# EAGLE board brick_i2c_humidity_Si7034 (EAGLE 7.4.0)
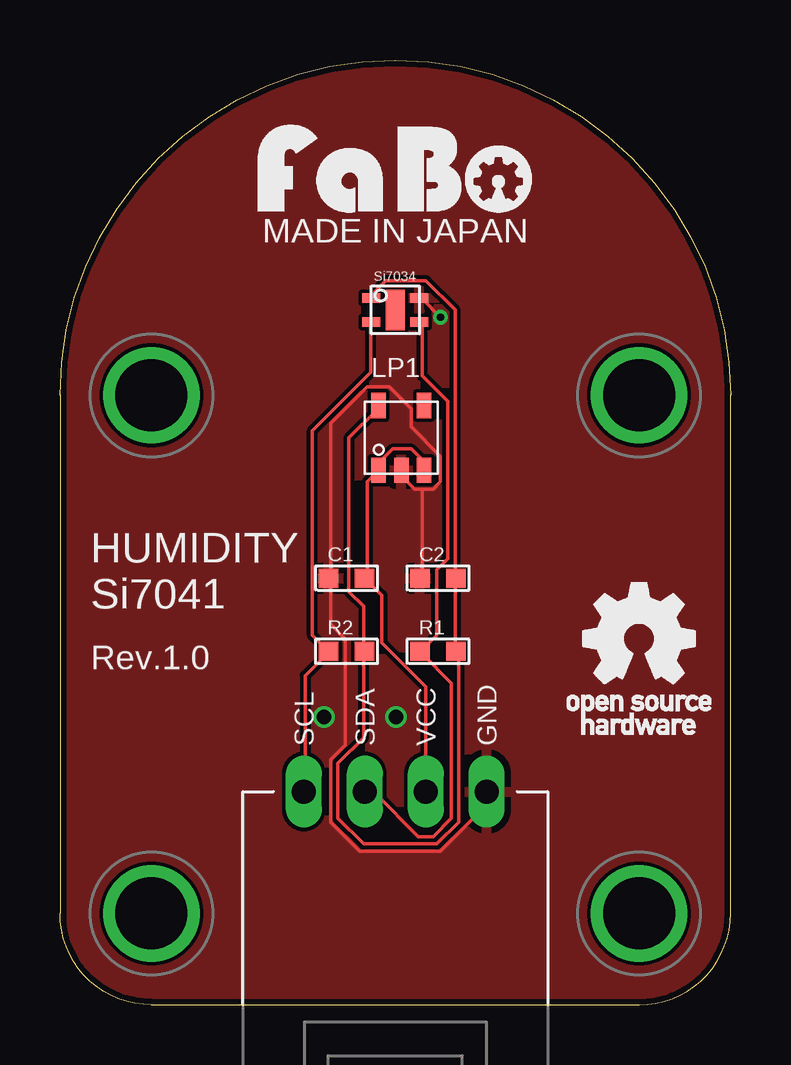
[diagram p0: board, top side]
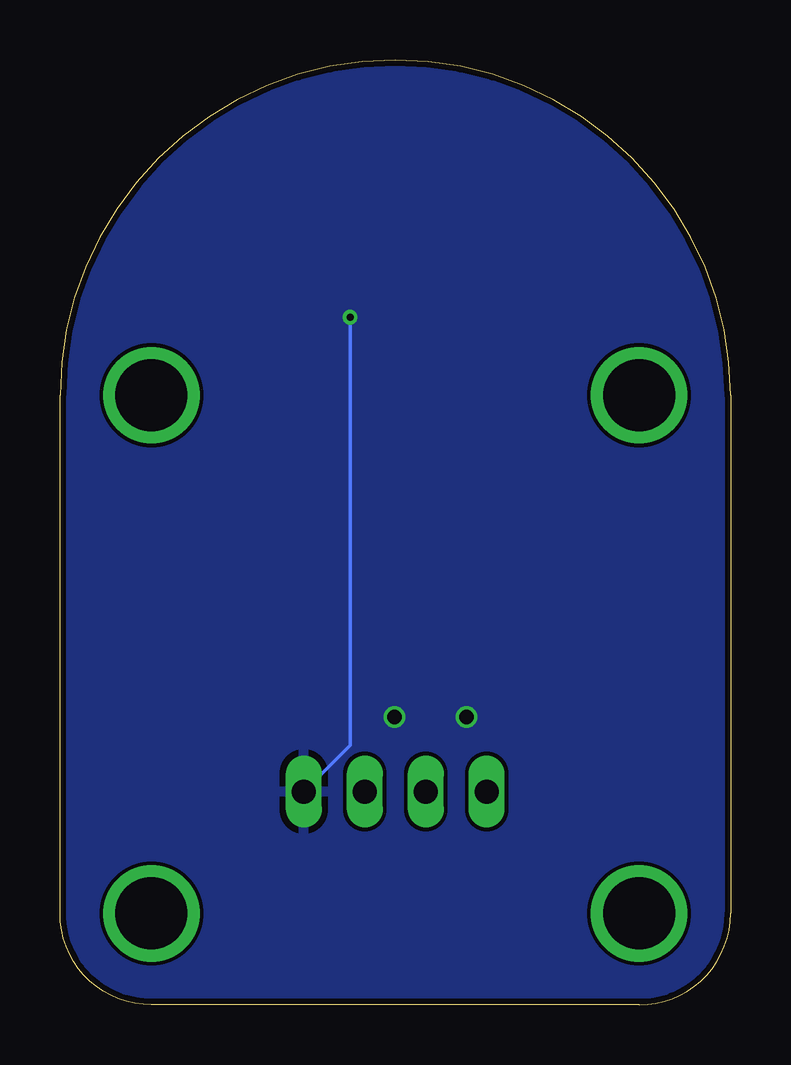
[diagram p1: board, bottom side, seen from below]

Size 27.94 x 39.37 mm. Coordinates in mm from the lower left corner, seen from the top.
Copper layers (1*16): Top 0.035mm / dielectric 1.5mm / Bottom 0.035mm
Design rules "Elecrow_2-layer_eagle_rule": minimum track width 6mil, minimum drill 12mil, track to track 6mil, track to pad 6mil, pad to pad 6mil, via to via 6mil, smd to smd 0mil, copper to edge 10mil, drill to drill 10mil, minimum pad ring 10mil, minimum via ring 6mil, stop-mask expansion 2mil, vias tented up to drill 100mil, thermal gap 10mil

## Footprints (pad centres in the part's own frame; a part is rotated, then mirrored left to right if it is on the bottom)
0603 = smd 0.8 x 0.8: 1 -0.75,0; 2 0.75,0
BRICK_I2C = drill 1 long: GND 3.81,-10.16; SCL -3.81,-10.16; SDA -1.27,-10.16; VCC 1.27,-10.16 | drill 3 pad 3.81: P$1 -10.16,6.35; P$2 10.16,6.35; P$3 -10.16,-15.24; P$4 10.16,-15.24
TI-LP2985 = smd 0.6 x 1.05: 1 -0.95,-1.35; 2 0,-1.35; 3 0.95,-1.35; 4 0.95,1.35; 5 -0.95,1.35
SILICONLABS-SI7034 = smd 0.75 x 0.4: 1 -1,0.5; 2 -1,-0.5; 4 1,-0.5; 5 1,0.5 | smd 0.8 x 1.7: 36 0,0

## Placement (x,y rotation side)
C1  1uf  [0603]  11.94,17.78 0 top
C2  2.2pf  [0603]  15.75,17.78 0 top
J1  [BRICK_I2C]  13.97,19.05 0 top
LP1  [TI-LP2985]  14.22,23.62 0 top
R1  4.7K  [0603]  15.75,14.73 0 top
R2  4.7K  [0603]  11.94,14.73 0 top
U$2  [LOGO_FABO_M]  13.97,33.02 0 top
U$3  SILICONLABS-SI7034  [SILICONLABS-SI7034]  13.97,28.96 0 top
U$4  [LOGO_OSHW_T_M]  24.13,15.24 0 top

## Library data of the parts
C1 C2 = FaBo-Capacitor
J1 U$4 = gclue
LP1 = FaBo-Supply
R1 R2 = FaBo-Resistors
U$2 = FaBo
U$3 = FaBo-Mems

## Nets
1.8V: C2.2 LP1.5 R1.2 R2.2 U$3.1
3.3V: C1.2 J1.VCC LP1.1 LP1.3
GND: C1.1 C2.1 J1.GND LP1.2 U$3.5
SCL: J1.SCL R2.1 U$3.2
SDA: J1.SDA R1.1 U$3.4

## Tracks (layer width: path | path; a pad name or v marks a point on that pad's centre or on a via)
1.8V
  Top 0.152: LP1.5 13.26,24.84 12.04,23.62 12.04,17.22 12.65,16.61 12.65,14.78 R2.2 12.65,14.63 12.65,11.12 11.58,10.06 11.58,7.77 12.65,6.71 15.7,6.71 16.61,7.62 16.61,14.63 R1.2 16.46,14.78 16.46,17.68 C2.2 16.46,17.83 16.46,28.96 15.24,30.18 13.56,30.18 13.11,29.72 13.11,29.57 U$3.1
3.3V
  Top 0.152: LP1.3 15.09,22.4 15.09,22.71 14.63,23.16 13.87,23.16 13.41,22.71 13.41,22.4 LP1.1 13.26,22.25 12.8,21.79 12.8,17.83 C1.2 12.8,17.68 13.41,17.07 13.41,15.09 15.24,13.26 J1.VCC
GND  (via drill 0.3, 0.6)
  Top 0.152: 15.09,21.49 14.78,21.49 14.33,21.95 14.33,22.25 LP1.2 | 15.09,21.49 15.54,21.49 15.85,21.79 15.85,22.86 14.63,24.08 14.63,24.84 13.72,25.76 12.8,25.76 11.28,24.23 11.28,17.83 C1.1 11.28,17.68 11.28,15.85 11.89,15.24 11.89,10.82 11.28,10.21 11.28,7.62 12.5,6.4 15.85,6.4 17.68,8.23 17.68,8.84 J1.GND | 15.09,21.49 15.09,17.83 C2.1 | v15.85,28.65 15.09,29.41 U$3.5
  Bottom 0.152: v15.85,28.65 15.85,10.82 J1.GND
  other vias: 14,12 11,12
  pour Bottom: -1,-6 29,-6 29,40 -1,40
  pour Top: -1,-6 29,-6 29,40 -1,40
SCL
  Top 0.152: U$3.2 12.95,28.35 12.95,26.36 10.52,23.93 10.52,15.39 11.12,14.78 R2.1 11.12,14.63 10.21,13.72 10.21,8.99 J1.SCL
SDA
  Top 0.152: U$3.4 15.09,28.35 15.09,26.21 16.15,25.15 16.15,18.59 15.7,18.14 15.7,15.39 15.09,14.78 R1.1 15.09,14.63 16.31,13.41 16.31,7.77 15.54,7.01 14.94,7.01 13.11,8.84 12.8,8.84 J1.SDA

## Text on the board
tPlace: MADE IN JAPAN | HUMIDITY / Si7041 | Rev.1.0